# Altium PCB PCB-sensor.PcbDoc
Units mm, origin at the board's own origin, x right, y up, seen from the top; angles counter-clockwise.
Board outline 50.04 x 50.04 mm, 2 copper layers (Top Layer, Bottom Layer); 12 components, 10 nets, 35 pads, 2 vias.
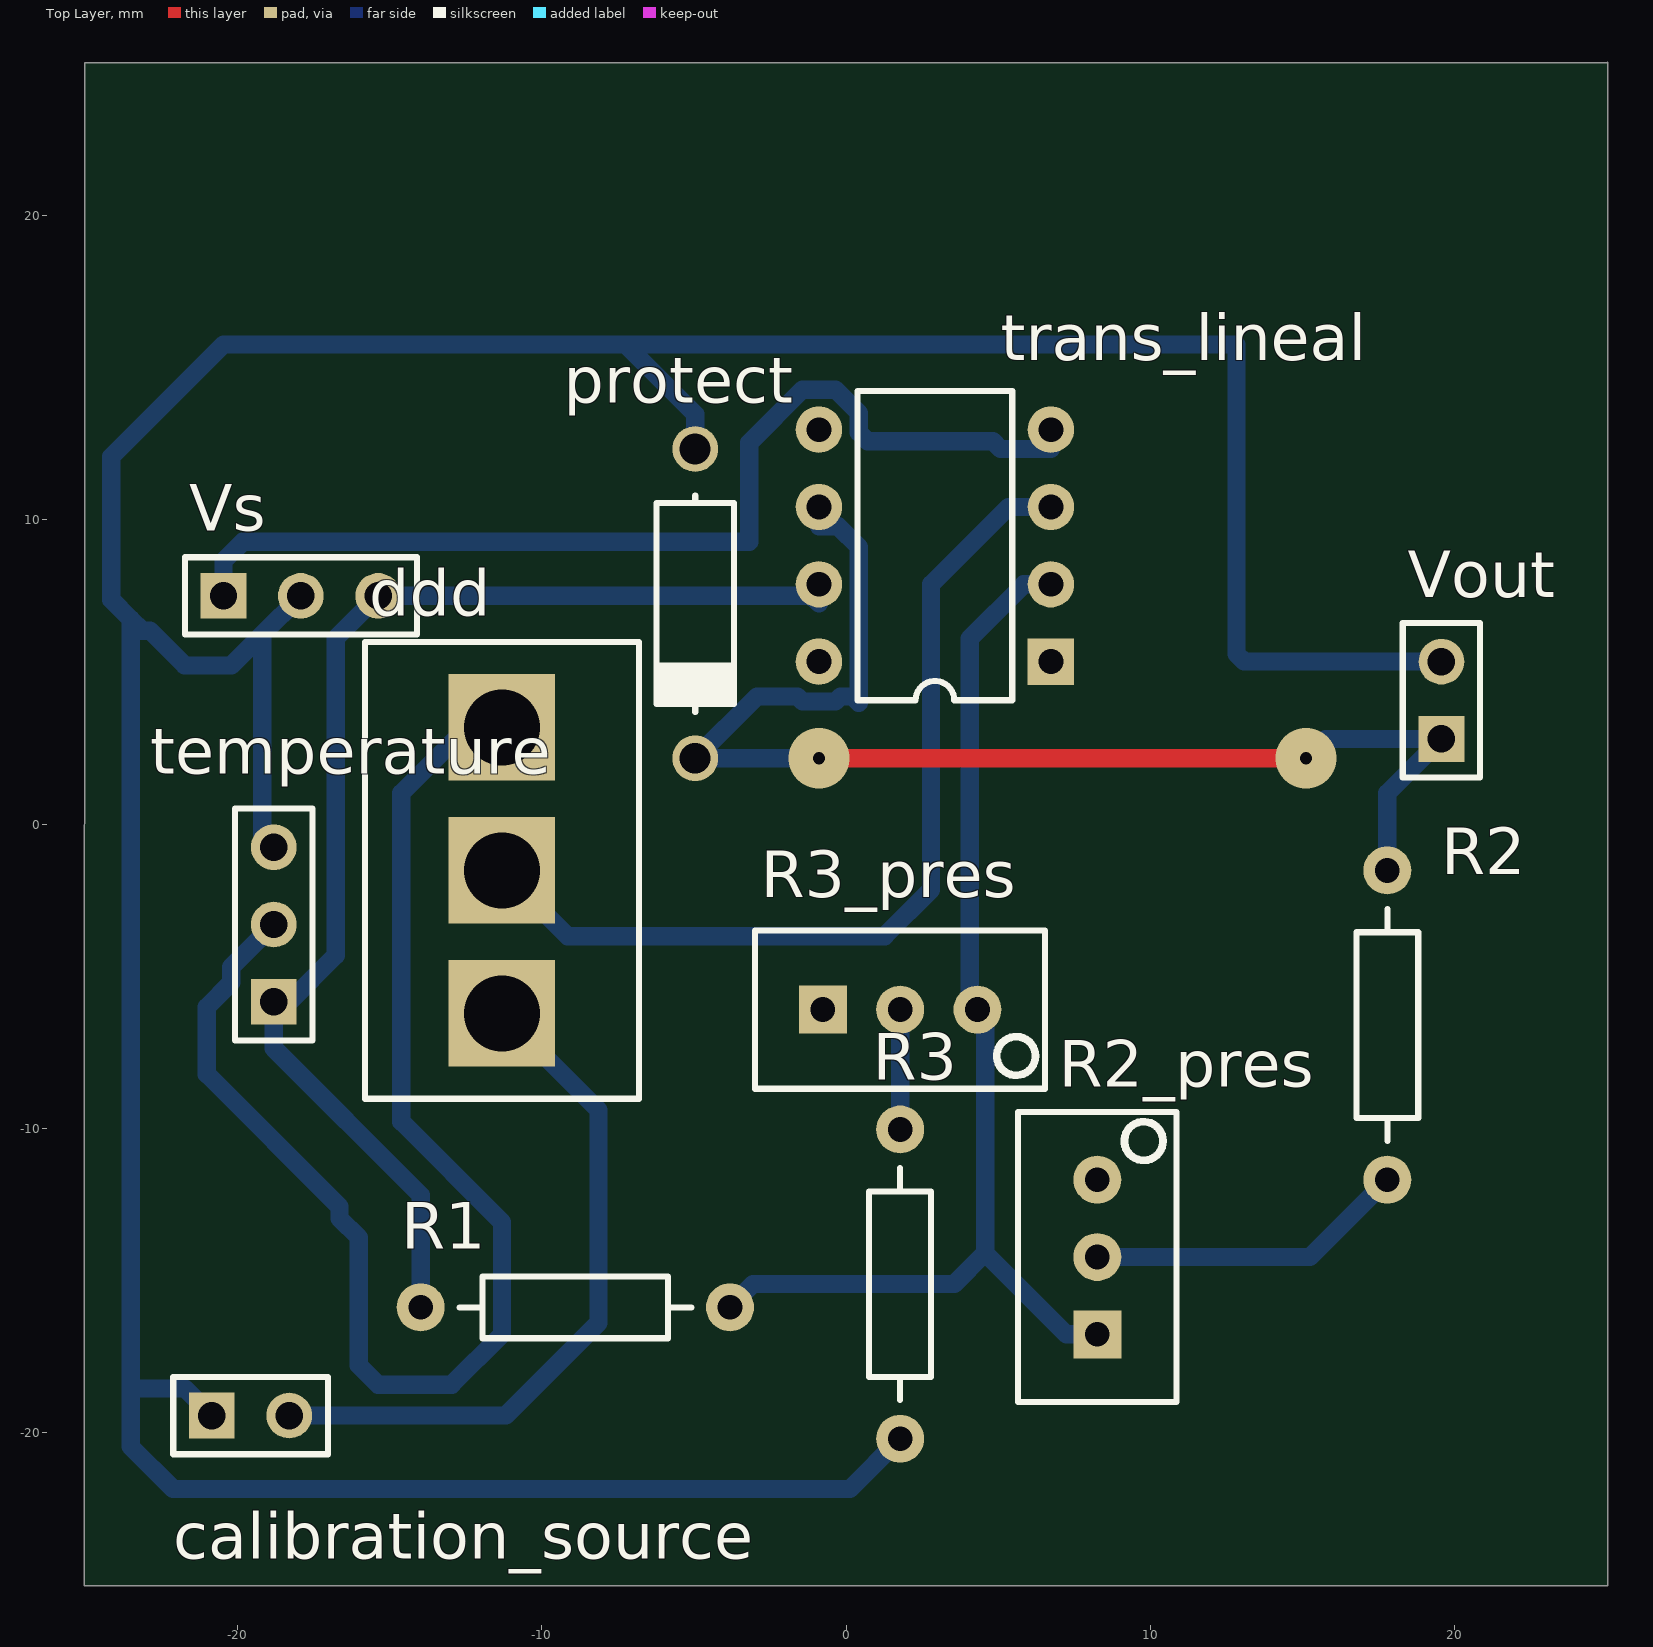
[diagram p0: Top Layer view]
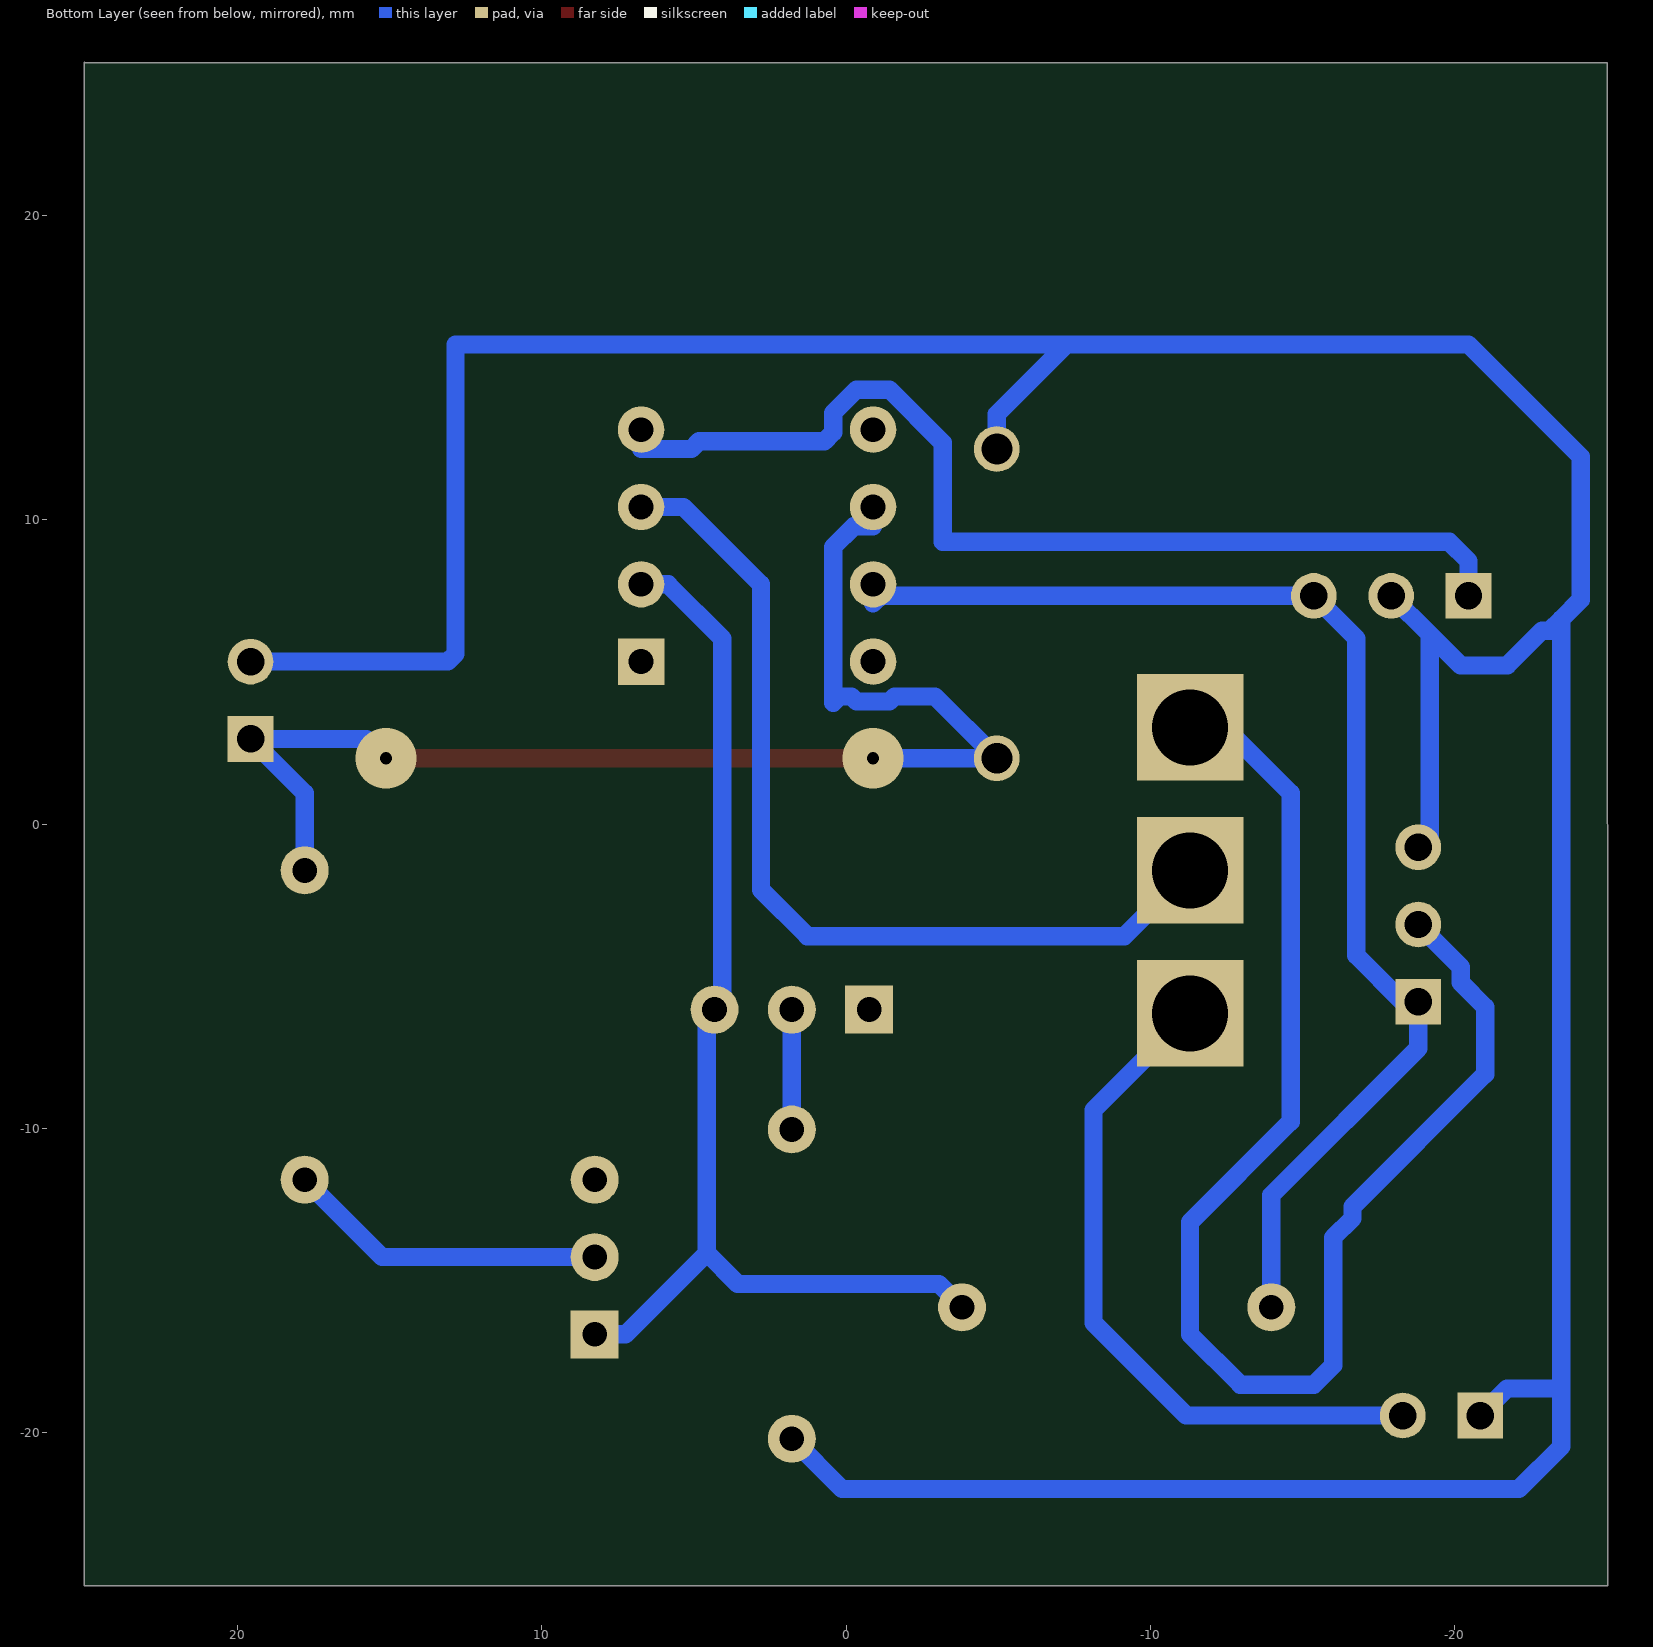
[diagram p1: Bottom Layer view, seen from below]
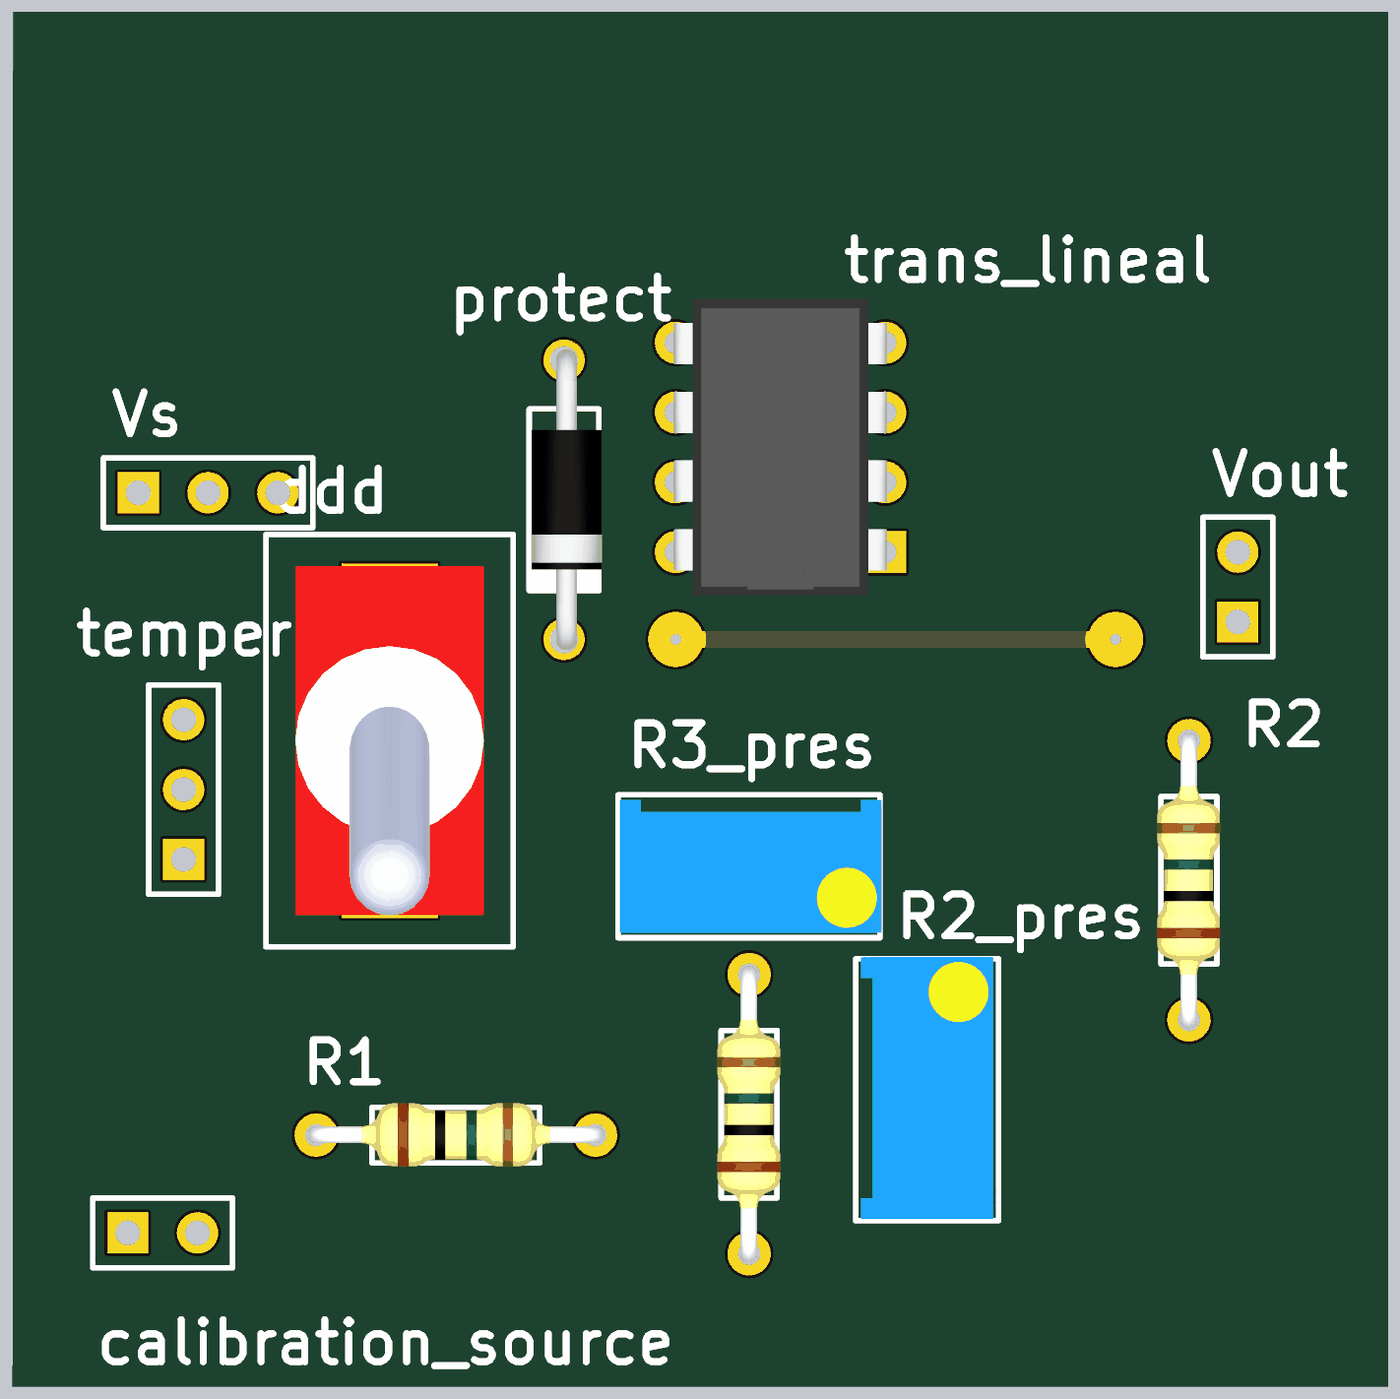
[diagram p2: 3D render of the assembled board from above, using the file's embedded part models]

## Layer stack, top to bottom
Top Solder: solder mask 0.0102, Solder Resist, Dk 3.5
Top Layer: signal copper 0.0356
Dielectric 1: dielectric 0.32, FR-4, Dk 4.8
Bottom Layer: signal copper 0.0356
Bottom Solder: solder mask 0.0102, Solder Resist, Dk 3.5

## Board outline
-25.019,-25.019 25.019,-25.019 25.019,25.019 25,25 -25,25

## Design rules (kind name [scope] priority, off if disabled: settings)
Clearance [All] p1: gap=0.25 ignorepadtopadclearanceinfootprint=FALSE except(0: Arc-Hole Track-Hole SMDPad-Hole THPad-Hole Via-Hole Fill-Hole Poly-Hole Region-Hole Text-Hole)
Height [All] p1: minheight=0 maxheight=30 prefheight=12.7
PolygonConnect [All] p1: connectstyle=Relief reliefconductorwidth=0.254 reliefentries=4 polygonreliefangle="90 Angle" airgapwidth=0.254
RoutingVias [All] p1: holewidth=0.5 width=2 viastyle="Through Hole" minholewidth=0.3 minwidth=1.5 maxholewidth=0.4 maxwidth=2.5
SolderMaskExpansion [All] p1: expansion=0.102
Width [All] p1: maxlimit=0.9 minlimit=0.6 preferedwidth=0.7
29 further rules are at their usual default settings.

## Components (designator, comment, footprint, x,y, rotation, side; value= is the part's Value field where it differs from the comment)
calibration_source "calibration_source" HDR1X2 -20.828,-19.431 r0 top
ddd "TOGGLE_SWITCH" "TOOGLE SWITCH SIMPLE" -11.303,-1.524 r0 top
protect "DIODO ZENER" DO41 -4.953,7.239 r270 top
R1 "RES" RES400 -13.97,-15.875 r0 top
R2 "RES" RES400 17.78,-11.684 r90 top
R2_pres "PRESET" "PRESET V" 8.255,-14.224 r90 top
R3 "RES" RES400 1.778,-20.193 r90 top
R3_pres "PRESET" "PRESET V" 1.778,-6.096 r0 top
temperature "Header 3" HDR1X3 -18.796,-5.842 r90 top
trans_lineal "LM741" DIP8 6.731,5.334 r180 top
Vout "Vout" HDR1X2 19.558,2.794 r90 top
Vs "Vs" HDR1X3 -20.447,7.493 r0 top

## Footprints (in the part's own frame and the unit in brackets; to place one, negate y for a bottom-side part, rotate by r counter-clockwise, add the part's x,y. Pads: shape width x height; smd on the part's side, far side on the other; paste and mask are expansions set on the pad)
DIP8 [mil]
  rect 60x60 hole 32: 1(0,0)
  round 60 hole 32: 2(0,-100) 3(0,-200) 4(0,-300) 5(300,-300) 6(300,-200) 7(300,-100) 8(300,0)
  silkscreen extent 50,-350 250,50, body extent -3,-363 303,63, height 177
DO41 [mm]
  round 1.5 hole 1.016: 1(-5.08,0) 2(5.08,0)
  silkscreen extent -3.56,-1.27 3.56,1.27, body extent -5.46,-1.19 5.46,1.37, height 2.03
HDR1X2 [mm] "Connector; Header; 2 Position"
  rect 1.5x1.5 hole 0.9: 1(0,0)
  round 1.5 hole 0.9: 2(2.54,0)
  silkscreen extent -1.27,-1.27 3.81,1.27
HDR1X3 [mm] "Connector; Header; 3 Position"
  rect 1.5x1.5 hole 0.9: 1(0,0)
  round 1.5 hole 0.9: 2(2.54,0) 3(5.08,0)
  silkscreen extent -1.27,-1.27 6.35,1.27
"PRESET V" [mil]
  rect 62x62 hole 32: 1(-100,0)
  round 62 hole 32: 2(0,0) 3(100,0)
  silkscreen extent -188,-102 188,102, body extent -185,-95 190,95, height 455
RES400 [mil]
  round 62 hole 32: 1(0,0) 2(400,0)
  silkscreen extent 50,-40 350,40, body extent -12,-45 412,46, height 96
"TOOGLE SWITCH SIMPLE" [mm]
  rect 3.5x3.5 hole 2.5: 1(0,4.699) 2(0,0) 3(0,-4.699)
  silkscreen extent -4.5,-7.5 4.5,7.5, body extent -3.43,-6.36 3.43,6.36, height 28.55

## Part data
calibration_source Vout: library part "Header 2", "Header, 2-Pin", LatestRevisionDate=17-Jul-2002, LatestRevisionNote="Re-released for DXP Platform.", Publisher="Altium Limited"
ddd: "Pulsador con reteción"
temperature: "Header, 3-Pin", LatestRevisionDate=17-Jul-2002, LatestRevisionNote="Re-released for DXP Platform.", Publisher="Altium Limited"
trans_lineal: "LM741 Operational Amplifier"
Vs: library part "Header 3", "Header, 3-Pin", LatestRevisionDate=17-Jul-2002, LatestRevisionNote="Re-released for DXP Platform.", Publisher="Altium Limited"

## Via types
v1: diameter 2, hole 0.4, Top Layer to Bottom Layer, 2 vias

## Nets (pads, with @x,y where several pads share a name; then routed paths per layer and width w, separated by ;. In a path a pad name is that pad's centre, name@x,y a point inside that pad or via, vN(x,y) a via of type N, cw(c..) or ccw(c..) an arc to the next point about the centre after c; other vN are vias at no path point)
GND: calibration_source.1 protect.1 R3.1 temperature.3 Vout.2 Vs.2 | length 136.7
  Bottom Layer w0.6: calibration_source.1 -21.717,-18.542 -23.495,-18.542 ; temperature.3 -19.177,-0.381 -19.177,6.223 ; Vs.2 -19.177,6.223 ; protect.1@-5.08,12.446 protect.1 -4.953,13.462 -7.239,15.748 ; R3.1 0.127,-21.844 -22.098,-21.844 -23.495,-20.447 -23.495,-18.542 ; Vout.2 13.081,5.334 12.827,5.588 12.827,15.748 -7.239,15.748 ; -23.495,-18.542 -23.495,6.731 ; -23.495,6.731 -24.13,7.366 -24.13,12.065 -20.447,15.748 -7.239,15.748 ; -23.495,6.731 -23.114,6.35 -22.86,6.35 -21.717,5.207 -20.193,5.207 -19.177,6.223
min-Vsupply: trans_lineal.4 Vs.1 | length 33.7
  Bottom Layer w0.6: Vs.1 -20.447,8.636 -19.812,9.271 -3.175,9.271 -3.175,12.523 -1.432,14.266 -0.346,14.266 0.423,13.497 0.423,12.862 0.712,12.573 4.826,12.573 5.08,12.319 trans_lineal.4@6.731,12.319
Netcalibration_source_2: calibration_source.2 ddd.3 | length 22.9
  Bottom Layer w0.6: calibration_source.2 -11.176,-19.431 -8.128,-16.383 -8.128,-9.398 ddd.3
Netddd_1: ddd.1 temperature.2 | length 46.4
  Bottom Layer w0.6: temperature.2 -20.193,-4.699 -20.193,-5.207 -20.994,-6.008 -20.994,-8.216 -16.637,-12.573 -16.637,-12.954 -16.002,-13.589 -16.002,-17.78 -15.367,-18.415 -12.954,-18.415 -11.303,-16.764 -11.303,-13.081 -14.605,-9.779 -14.605,1.016 -12.446,3.175 ddd.1
Netddd_2: ddd.2 trans_lineal.3 | length 30.6
  Bottom Layer w0.6: ddd.2 -9.144,-3.683 1.27,-3.683 2.794,-2.159 2.794,7.874 5.334,10.414 trans_lineal.3
Netprotect_2: protect.2 R2.2 trans_lineal.6 Vout.1 | length 43.8
  Top Layer w0.6: protect.2 protect.2@-4.699,2.413 ; v1(-0.889,2.159) v1(15.113,2.159) ; Vout.1@19.177,2.413 Vout.1
  Bottom Layer w0.6: v1(-0.889,2.159) protect.2 -2.921,4.191 -1.601,4.191 -1.432,4.022 -0.346,4.022 -0.177,4.191 0.211,4.191 0.423,3.979 0.423,9.102 -0.254,9.779 trans_lineal.6@-0.889,9.779 ; v1(15.113,2.159) v1@15.748,2.794 ; v1@15.875,2.794 Vout.1 17.78,1.016 R2.2
NetR1_2: R1.2 R2_pres.1 R3_pres.3 trans_lineal.2 | length 37.7
  Bottom Layer w0.6: R1.2 -3.048,-15.113 3.556,-15.113 4.572,-14.097 ; trans_lineal.2 5.842,7.874 4.064,6.096 4.064,-5.842 R3_pres.3 4.572,-6.35 4.572,-14.097 ; R2_pres.1 7.239,-16.764 4.572,-14.097
NetR2_1: R2.1 R2_pres.2 | length 10.6
  Bottom Layer w0.6: R2_pres.2 15.24,-14.224 R2.1
NetR3_2: R3.2 R3_pres.2 | length 3.9
  Bottom Layer w0.6: R3.2 R3_pres.2
Vsupply: R1.1 temperature.1 trans_lineal.7 Vs.3 | length 41.7
  Bottom Layer w0.6: R1.1 -13.97,-12.192 -18.796,-7.366 temperature.1 -18.288,-5.842 -16.764,-4.318 -16.764,6.096 Vs.3 -1.143,7.493 trans_lineal.7@-0.889,7.239
pads on no net: R2_pres.3 R3_pres.1 trans_lineal.1 trans_lineal.5 trans_lineal.8

## Silkscreen, mask and mechanical layers (free items; w line width, h text height)
Mechanical 1:
  the board outline again, w0.1